# Altium PCB dsPIC Click v1.1.PcbDoc
Units mil, origin at the board's own origin, x right, y up, seen from the top; angles counter-clockwise.
Board outline 1500 x 2500 mil, 2 copper layers (Top Layer, Bottom Layer); 74 components, 48 nets, 196 pads, 18 vias.
Unrouted connection lines stored in the file: 52.
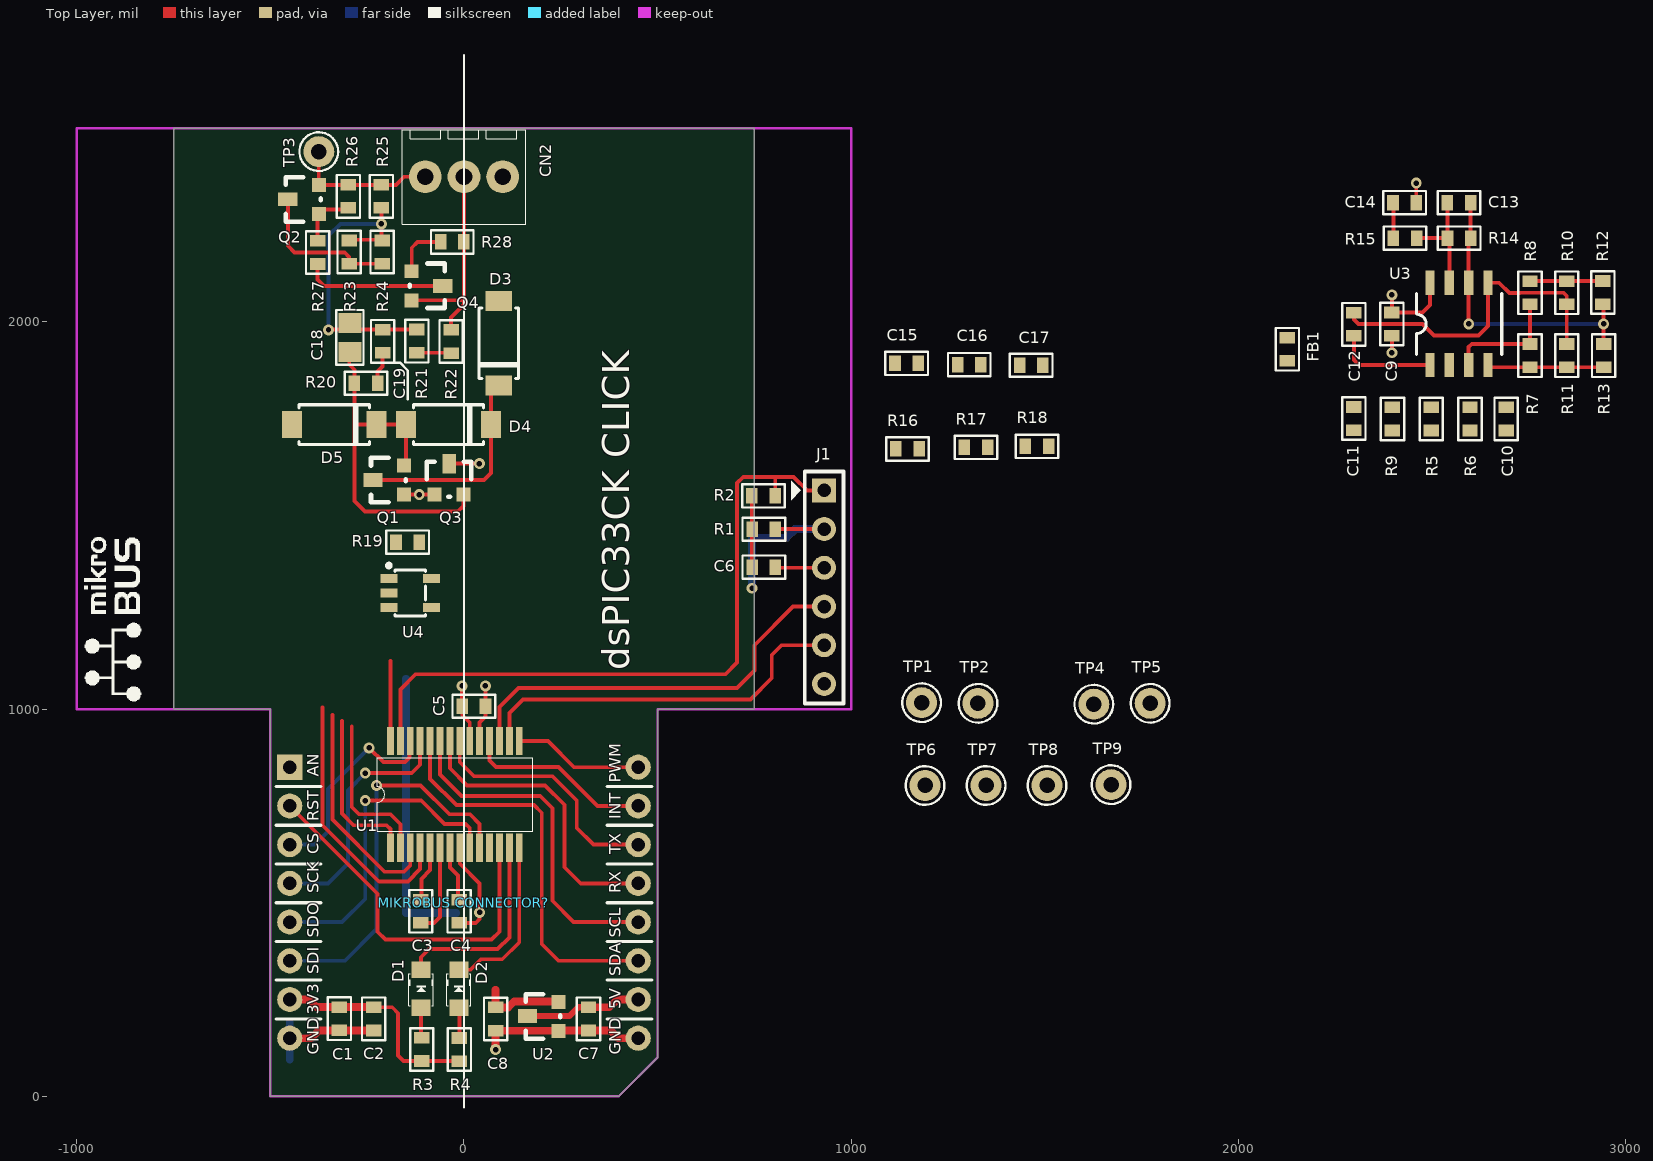
[diagram p0: Top Layer view]
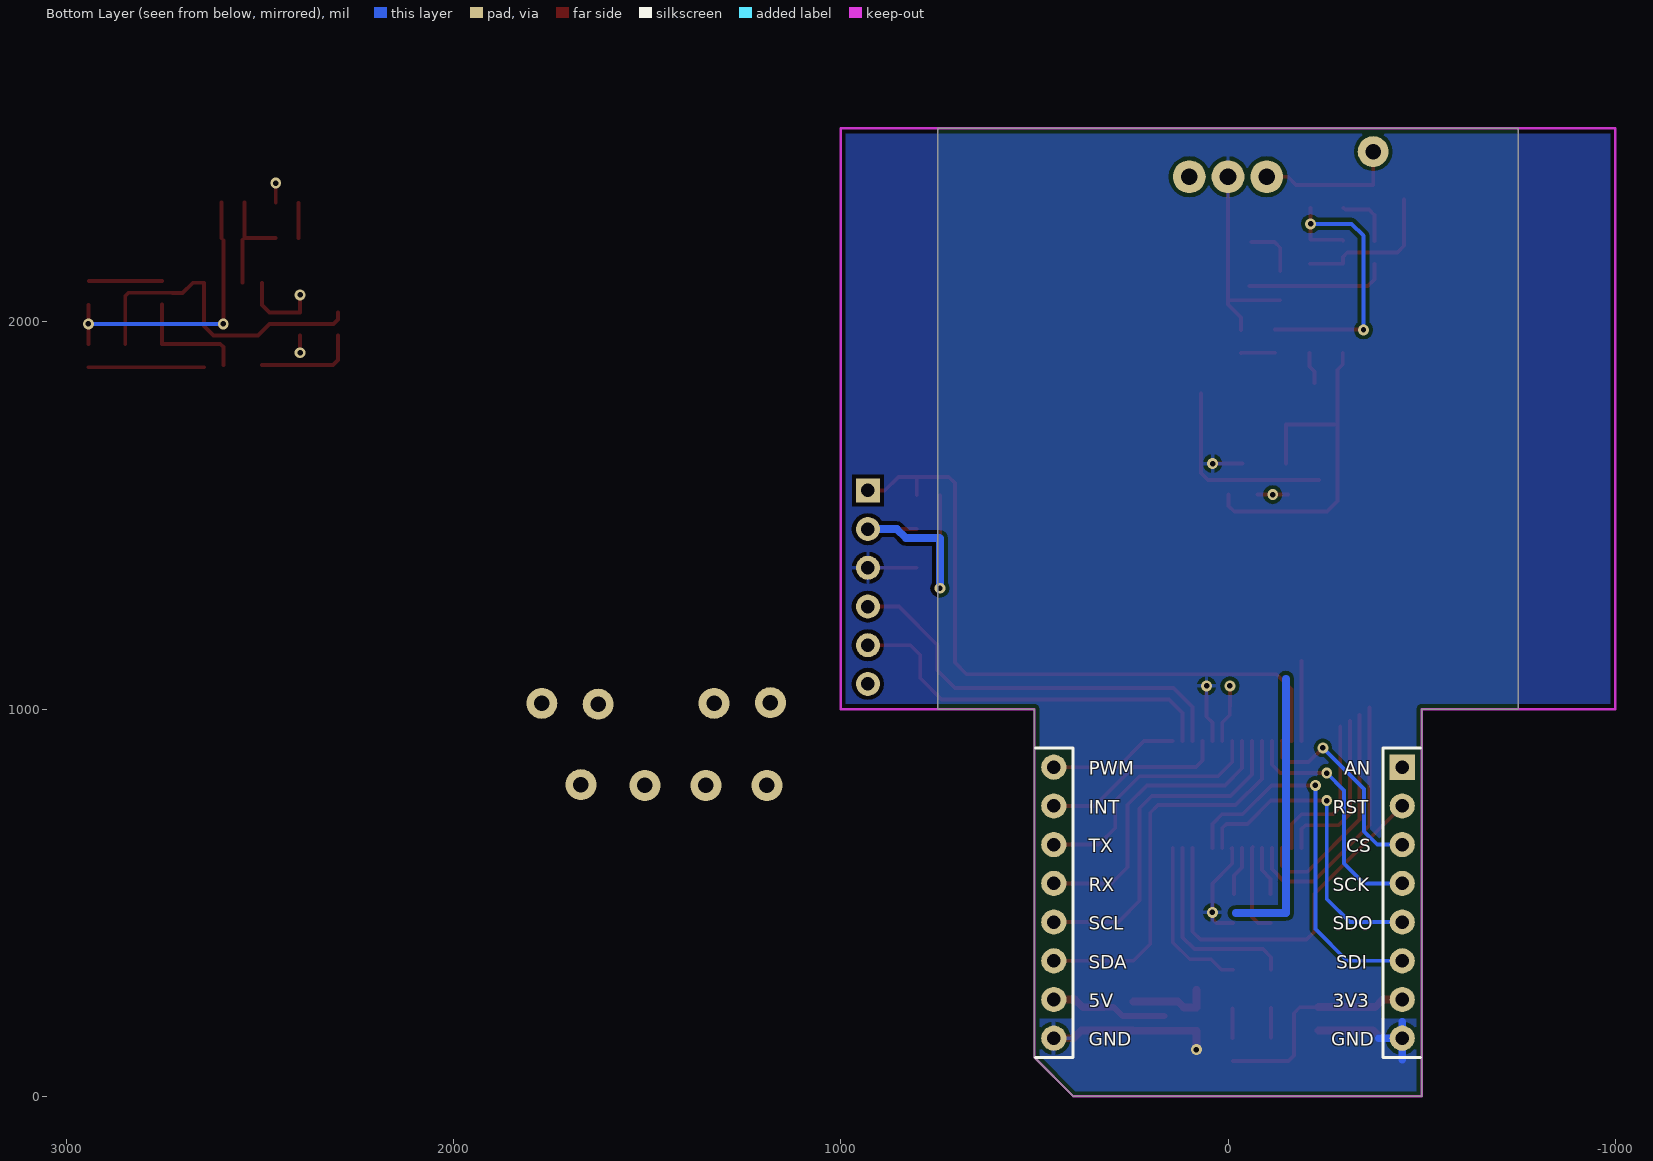
[diagram p1: Bottom Layer view, seen from below]

## Layer stack, top to bottom
Top Solder: solder mask 0.4, Solder Resist, Dk 3.5
Top Layer: signal copper 1.4
Dielectric 1: dielectric 12.6, FR-4, Dk 4.8
Bottom Layer: signal copper 1.4
Bottom Solder: solder mask 0.4, Solder Resist, Dk 3.5

## Board outline
-750,1000 -750,2500 750,2500 750,1000 500,1000 500,100 400,0 -500,0 -500,1000

## Design rules (kind name [scope] priority, off if disabled: settings)
Clearance [All] p1: gap=10
PolygonConnect [All] p1: connectstyle=Relief reliefconductorwidth=10 reliefentries=4 polygonreliefangle="90 Angle" airgapwidth=10
RoutingVias [All] p1: holewidth=28 width=50 viastyle="Through Hole" minholewidth=28 minwidth=50 maxholewidth=28 maxwidth=50
SolderMaskExpansion [All] p1: expansion=4
Width [All] p1: maxlimit=100 minlimit=8 preferedwidth=10 minimp=50.000000 maximp=50.000000 favimp=50.000000
30 further rules are at their usual default settings.

## Components (designator, comment, footprint, x,y, rotation, side; value= is the part's Value field where it differs from the comment)
C1 "1uF" 0603 -320,170 r90 top locked
C2 "0.1uF" 0603 -235,230.42 r270 top locked
C3 "0.1uF" 0603 -110,447.6 r90 top locked
C4 "0.1uF" 0603 -10.83,447.6 r90 top locked
C5 "0.1uF" 0603 -5,1005.91 r0 top
C6 "0.1uF" 0603 744.02,1365 r0 top locked
C7 "0.1uF" 0603 320,230.42 r270 top
C8 "1uF" 0603 80,230 r270 top
C9 "0.1uF" 0603 2395,2025 r270 top
C10 "0.1uF" 0603 2690,1780 r270 top
C11 "47pF" 0603 2300,1720 r90 top
C12 "0.1uF" 0603 2300,1963.5 r90 top
C13 "1000pF" 0603 2600.42,2310 r180 top
C14 "680pF" 0603 2460,2310 r180 top
C15 "1uF" 0603 1112.93,1891.31 r0 top
C16 "0.015uF" 0603 1335.42,1891.31 r180 top
C17 "1500pF" 0603 1495.42,1889.72 r180 top
C18 "22uF" 0805 -294.8,1960 r90 top
C19 "0.1uF" 0603 -211.6,1980.42 r270 top
CN2 "1725669" 1725669 -100,2375 r0 top locked
D1 "LED Red" LTST-C171 -110.8,277.76 r90 top
D2 "LED Green" LTST-C171 -13.4,277.76 r90 top
D3 "SS14" SMA-FL 90,1945 r270 top
D4 "SS14" SMA-FL -40,1735 r0 top
D5 "SS14" SMA-FL -335.09,1735 r0 top
FB1 "FB" 0603 2125,1960 r270 top
J1 "ICSP" HDR1X6 930,1565 r270 top locked
"MIKROBUS CONNECTOR?" "MIKROBUS DEVICE CONN." MIKRO_BUS_DSPIC_T 0,0 r0 top locked
Q1 "MMBT3904" SOT-23 -155,1555 r90 top
Q2 "PMV48XP" SOT-23 -375,2280 r90 top
Q3 "MMBT3906" SOT-23 -75,1554 r0 top
Q4 "2N7002" SOT-23 -135,2130 r270 top
R1 "10k" 0603 744.02,1463 r0 top locked
R2 "470R" 0603 804.02,1552.4 r180 top locked
R3 "330R" 0603 -110.8,151.5 r270 top
R4 "330R" 0603 -13.4,151.07 r270 top
R5 "10K" 0603 2500,1719.15 r90 top
R6 "10K" 0603 2600,1719.15 r90 top
R7 "10K" 0603 2755,1882.6 r90 top
R8 "200K" 0603 2755,2045 r90 top
R9 "100K" 0603 2396.6,1780 r270 top
R10 "100K" 0603 2850,2045 r90 top
R11 "100K" 0603 2850,1882.6 r90 top
R12 "1K" 0603 2943.4,2045.42 r90 top
R13 "1K" 0603 2945,1882.6 r90 top
R14 "4.99K" 0603 2540,2215 r0 top
R15 "10K" 0603 2400,2215 r0 top
R16 "1K" 0603 1115,1670.32 r0 top
R17 "10K" 0603 1291.99,1674.46 r0 top
R18 "10K" 0603 1449.47,1677.24 r0 top
R19 "0R" 0603 -176,1430 r0 top
R20 "100K" 0603 -283.46,1840 r0 top
R21 "100K" 0603 -120,1920 r90 top
R22 "10K" 0603 -35,1980 r270 top
R23 "20R" 0603 -295,2150 r90 top
R24 "20R" 0603 -210,2150 r90 top
R25 "1K" 0603 -215,2355 r270 top
R26 "100K" 0603 -300,2355 r270 top
R27 "100K" 0603 -379.57,2210 r270 top
R28 "10K" 0603 -60.63,2205 r0 top
TP1 "Test Point" TP_KEYSTONE_5003 1181.88,1016.73 r90 top
TP2 "Test Point" TP_KEYSTONE_5003 1327.55,1015 r90 top
TP3 "Test Point" TP_KEYSTONE_5003 -375,2440 r90 top
TP4 "Test Point" TP_KEYSTONE_5003 1626.76,1012.8 r90 top
TP5 "Test Point" TP_KEYSTONE_5003 1772.43,1015 r90 top
TP6 "Test Point Red" TP_KEYSTONE_5003 1190.78,802.8 r90 top
TP7 "Test Point" TP_KEYSTONE_5003 1348.46,802.8 r90 top
TP8 "Test Point" TP_KEYSTONE_5003 1505.94,802.8 r90 top
TP9 "Test Point" TP_KEYSTONE_5003 1671.29,805 r90 top
U1 "dsPIC33CK256MC502" SSOP-28 -23.62,779.53 r0 top locked
U2 "MCP1754ST-3.3v" SOT-23 244.09,170 r90 top
U3 "MCP6002" SOIC-8 2570,1995 r90 top
U4 "MCP6001" TSOP-5 -138.78,1300 r270 top
? "MikroBusLogo" MB_Large -905,1040 r90 top locked

## Footprints (in the part's own frame and the unit in brackets; to place one, negate y for a bottom-side part, rotate by r counter-clockwise, add the part's x,y. Pads: shape width x height; smd on the part's side, far side on the other; paste and mask are expansions set on the pad)
0603 [mil]
  rect 30x40 smd: 1(0.42,1.6) 2(60.42,1.6)
  silkscreen extent -25,-28 85,32
0805 [mm]
  rect 1.3x1.5 smd: 1(-0.95,0) 2(0.95,0)
  silkscreen extent -1.8,-0.9 1.8,0.9
1725669 [mil] "Connector; Terminal; 3 Position, 2.45mm"
  round 85 hole 43.31: 1(0,0) 2(100,0) 3(200,0)
  silkscreen extent -59,-122 259,122
HDR1X6 [mil]
  rect 62x62 hole 35: 1(0,0)
  round 62 hole 35: 2(100,0) 3(200,0) 4(300,0) 5(400,0) 6(500,0)
  silkscreen extent -49,-85 550,50
LTST-C171 [mm] "led, 0805"
  rect 1.1x1.25 smd: 1(-1.25,0) 2(1.25,0)
  silkscreen extent -1.1,-0.8 1,0.8
MB_Large [mil]
  silkscreen extent -20,-71 404,76
MIKRO_BUS_DSPIC_T [mil]
  rect 65x65 hole 35: 1(-450,850)
  round 65 hole 35: 2(-450,750) 3(-450,650) 4(-450,550) 5(-450,450) 6(-450,350) 7(-450,250) 8(-450,150) 9(450,150) 10(450,250) 11(450,350) 12(450,450) 13(450,550) 14(450,650) 15(450,750) 16(450,850)
  silkscreen extent -485,200 485,800, body extent -508,100 507,900, height 82
SMA-FL [mm]
  rect 1.3x1.76 smd: 1(-2.78,0) 2(2.78,0)
  silkscreen extent -2.3,-1.3 2.3,1.3
SOIC-8 [mm]
  rect 1.6x0.6 smd: 1(-2.7,1.905) 2(-2.7,0.635) 3(-2.7,-0.635) 4(-2.7,-1.905) 5(2.7,-1.905) 6(2.7,-0.635) 7(2.7,0.635) 8(2.7,1.905)
  silkscreen extent -2,-2.81 2,2.8
SOT-23 [mil]
  rect 36x36 smd: 1(-1,0) 2(74,0)
  rect 36x50 smd: 3(37,80)
  silkscreen extent -21,-5 94,85
SSOP-28 [mm]
  rect 0.45x1.85 smd mask+0.08: 1(-4.225,-3.5) 2(-3.575,-3.5) 3(-2.925,-3.5) 4(-2.275,-3.5) 5(-1.625,-3.5) 6(-0.975,-3.5) 7(-0.325,-3.5) 8(0.325,-3.5) 9(0.975,-3.5) 10(1.625,-3.5) 11(2.275,-3.5) 12(2.925,-3.5) 13(3.575,-3.5) 14(4.225,-3.5) 15(4.225,3.5) 16(3.575,3.5) 17(2.925,3.5) 18(2.275,3.5) 19(1.625,3.5) 20(0.975,3.5) 21(0.325,3.5) 22(-0.325,3.5) 23(-0.975,3.5) 24(-1.625,3.5) 25(-2.275,3.5) 26(-2.925,3.5) 27(-3.575,3.5) 28(-4.225,3.5)
  silkscreen extent -5.1,-2.4 5.1,2.4
TP_KEYSTONE_5003 [mil]
  round 80 hole 40: 1(0,0)
  silkscreen extent -50,-50 50,50
TSOP-5 [mm] "Small Outline; 6 Leads (1 Absent); Body Width 4.4 mm; Pitch 1.27 mm"
  rect 0.6x1.1 smd: 1(-0.95,-1.4) 2(0,-1.4) 3(0.95,-1.4) 4(0.95,1.4) 5(-0.95,1.4)
  silkscreen extent -1.92,-1.52 1.5,1

## Part data
C1 C2 C3 C4 C5 C6: "Capacitor"
C7 C8 C9 C10 C11 C12 C13 C14 C15 C16 C17 C18 C19: library part CAP, "Capacitor"
CN2: "Terminal Block, 3-Position"
D1: "Red LED"
D2: "Green LED"
D3 D4 D5: "Diode, Schottky"
FB1: "Ferrite Bead"
J1: library part "Header 6", "Header, 6-Pin"
"MIKROBUS CONNECTOR?": "mikroBUS Target Header"
Q1: "Transistor, NPN"
Q2: "MOSFET, P-Channel"
Q3: "Transistor, PNP"
Q4: "MOSFET"
R1 R2 R3 R4 R5 R6 R7 R8 R9 R10 R11 R12 R13 R14 R15 R16 R17 R18 R19 R20 R21 R22 R23 R24 R25 R26 R27 R28: library part Res1, "Resistor"
TP1 TP2 TP3 TP4 TP5 TP6 TP7 TP8 TP9: "Test Point, 5003"
U1: "16-bit MCU"
U2: "LDO"
U3: "OPAMP, Dual"
U4: "OPAMP, Single"
?: "Logo"

## Via types
v1: diameter 28, hole 14, Top Layer to Bottom Layer, 18 vias

## Nets (pads, with @x,y where several pads share a name; then routed paths per layer and width w, separated by ;. In a path a pad name is that pad's centre, name@x,y a point inside that pad or via, vN(x,y) a via of type N, cw(c..) or ccw(c..) an arc to the next point about the centre after c; other vN are vias at no path point)
+3.3: "MIKROBUS CONNECTOR?.7" C1.2 C2.1 C4.2 C5.1 J1.2 R1.2 R3.2 R4.2 U1.7 U1.20 | length 2032.8
  Top Layer w10: C2.1 -185.42,230 -170,214.58 -170,105 -156.07,91.07 R3.2 R4.2@-12.23,91.07 ; U1.7 -36.42,591.42 -15,570 C4.2@-15,522.4 ; v1(-5,1060) -5,1007.93 C5.1 -4.58,984.58 14.76,965.24 U1.20 ; R1.2@804.84,1465 J1.2
  Top Layer w20: -450,250 -399.58,250 -380,230.42 C1.2 -233.83,230.42 C2.1
  Bottom Layer w20: -149.61,1078.74 -149.61,555.12 ; -149.06,555.67 -149.61,555.12 ; -19.69,473.43 -149.61,473.43 -149.61,555.12 ; v1(744.02,1312.24) 744.02,1441.22 744.96,1442.17 832.36,1442.17 855.2,1465 J1.2
+3.3A: C3.2 C8.1 C9.1 R8.2 R10.2 R12.2 TP7.1 U1.5 U2.2 U3.8 | length 740.9
  Top Layer w10: C3.2@-110,522.4 -110,561.72 -87.6,584.12 U1.5 ; v1(2396.6,2070) C9.1 2475.32,2024.58 2495,2044.25 U3.8 ; R8.2@2753.83,2105.85 R12.2
  Top Layer w20: 81.6,275 C8.1 114.15,229.58 129.58,245 244.09,245 U2.2
+5: "MIKROBUS CONNECTOR?.10" C7.1 C15.1 D3.1 TP6.1 U2.3 U4.5 | length 303.7
  Top Layer w16: U2.3 272.42,207 295.42,230 C7.1
  Top Layer w20: C7.1 375.42,230 395.42,250 450,250
AGND: C3.1 C9.2 C10.2 C14.1 FB1.2 R7.1 R11.1 R13.1 U1.6 U3.4 | length 628.4
  Top Layer w10: C3.1@-110,447.6 -77.4,447.6 -62.01,462.99 U1.6 U1.6@-63.74,643.46 ; v1(2396.6,1920.42) C9.2 ; C14.1 v1(2459.58,2358.73) ; U3.4@2645,1883.02 R7.1 R11.1 R13.1
BAT_DETECT: R21.1 R22.2 U1.4 | length 773.5
  Top Layer w10: -365,1005 -365,700 -220,555 -145,555 -113.19,586.81 U1.4 ; R21.1 -34.25,1920.42 R22.2
BAT_SNS_ADC: C14.2 R15.1 TP1.1 U1.1 | length 520.8
  Top Layer w10: -315,970 -315,730 -285,700 -200,700 -189.96,689.96 U1.1 ; R15.1 C14.2@2400.42,2307.55
BAT_TH: CN2.3 U1.2 | length 413
  Top Layer w10: -290,955 -290,746.96 -271.39,728.35 -189.96,728.35 -164.37,702.76 U1.2
DAC_SINE: R16.1 TP4.1 U1.3 | length 579.4
  Top Layer w10: -340,985 -340,715 -205,580 -155,580 -138.78,596.22 U1.3
IRQ: "MIKROBUS CONNECTOR?.15" U1.18 | length 482.8
  Top Layer w10: U1.18 65.94,867.13 82.68,850.39 244.09,850.39 344.49,750 450,750
LED_GRN: D2.2 U1.14 | length 429.4
  Top Layer w10: D2.2 16.97,326.97 43.98,353.98 98.98,353.98 142.72,397.72 U1.14
LED_RED: D1.2 U1.13 | length 512.7
  Top Layer w10: D1.2 -110.8,359.2 -90,380 86.69,380 117.13,410.43 U1.13
MCLR: J1.1 R2.1 U1.27 | length 1789.1
  Top Layer w10: U1.27 -164.37,1050.63 -125,1090 675.59,1090 705.59,1120 705.59,1583.9 721.34,1599.65 804.02,1599.65 ; R2.1@804.02,1552.4 804.02,1599.65 ; J1.1 929.21,1564.21 886.69,1564.21 851.26,1599.65 804.02,1599.65
NetC6_1: C6.1 R1.1 R2.2 | length 187.4
  Top Layer w10: C6.1@744.02,1365 744.02,1456.93 R2.2@744.02,1552.4
NetC10_1: C10.1 R6.2 R7.2 R8.1 U3.3 | length 310.4
  Top Layer w10: U3.3 2595,1935 2603.02,1943.02 R7.2 R8.1
NetC11_1: C11.1 R5.2 R9.2 U3.2
NetC11_2: C11.2 C12.1 R9.1 U3.1 | length 265.3
  Top Layer w10: C12.1@2298.4,1965 2298.4,1901.6 2311.3,1888.7 U3.1
NetC12_2: C12.2 R10.1 R11.2 U3.5 | length 845
  Top Layer w10: C12.2@2298.4,2024.42 C12.2 2298.4,2006.6 2310.42,1994.58 2475.42,1994.58 2505,1965 2620,1965 2645,1990 U3.5 2673.7,2101.3 2700,2075 2726.76,2075 2727.19,2075.42 2839.58,2075.42 2848.4,2066.6 R10.1 R11.2
NetC13_1: C13.1 R12.1 R13.2 R14.2 U3.6 | length 757.2
  Top Layer w10: v1(2595,1995) U3.6 R14.2@2595,2211.17 ; R14.2@2600,2217.02 C13.1 ; R13.2 v1(2943.4,1995) R12.1@2943.4,2044.25
  Bottom Layer w10: v1(2595,1995) v1(2943.4,1995)
NetC13_2: C13.2 R14.1 R15.2 U3.7 | length 281.9
  Top Layer w10: R15.2 2460.85,2217.02 2540,2217.02 C13.2 ; U3.7 R14.1@2545,2212.02
NetC16_1: C16.1 R16.2 R17.1
NetC18_1: C18.1 D4.1 D5.2 Q1.2 Q3.2 R20.1 TP2.1 | length 951
  Top Layer w10: C18.1@-296.4,1920.42 -296.4,1890 -283.04,1876.64 R20.1 -283.04,1537.72 -255.31,1510 -16,1510 -1,1525 Q3.2 ; -283.04,1735 D5.2 D4.1 Q1.2@-149.45,1634.55
NetC18_2: C18.2 C19.1 R21.2 R23.2 R24.2 R25.2 | length 787.2
  Top Layer w10: v1@-350,1980.42 -296.4,1980.42 R21.2 ; R23.2 -294.8,2212.23 -213.4,2212.23 v1(-213.4,2253.4) R25.2
  Bottom Layer w10: v1(-350,1979.58) -350,2222.83 -319.43,2253.4 v1(-213.4,2253.4)
NetC19_2: C19.2 R18.2 R20.2 | length 83.8
  Top Layer w10: R20.2 -223.04,1871.96 -210,1885 C19.2
NetD1_1: D1.1 R3.1 | length 77.5
  Top Layer w10: R3.1@-110.8,151.07 D1.1
NetD2_1: D2.1 R4.1 | length 76.3
  Top Layer w10: R4.1 D2.1@-11.8,226.94
NetD3_2: D3.2 D4.2 Q1.3 | length 517.2
  Top Layer w10: Q1.3 52,1592 69.45,1609.45 D4.2 D3.2@69.45,1815
NetQ1_1: Q1.1 Q3.1 R19.2 | length 79
  Top Layer w10: Q1.1 Q3.1
  other v1: -115.5,1554
NetQ2_1: Q2.1 R26.2 R27.1 | length 153.7
  Top Layer w10: R27.1 -377.97,2276.03 Q2.1 -364,2290 -302.98,2290 R26.2
NetQ2_3: Q2.3 R23.1 R24.1 | length 393.1
  Top Layer w10: Q2.3 -455,2196.93 -437.65,2179.58 -307.98,2179.58 -296.6,2168.2 R23.1 R24.1
NetQ4_3: Q4.3 R27.2 | length 369.6
  Top Layer w10: R27.2 -377.97,2110 -360.97,2093 Q4.3
NetR18_1: R18.1 U4.4
NetR19_1: R19.1 U4.1
PGC: J1.5 U1.16 | length 992.9
  Top Layer w10: U1.16 117.13,989.57 152.56,1025 740,1025 795,1080 795,1140 820,1165 J1.5
PGD: J1.4 U1.17 | length 1072.4
  Top Layer w10: U1.17 91.54,1005.91 140.63,1055 705,1055 750,1100 750,1165 850,1265 J1.4
PWM: "MIKROBUS CONNECTOR?.16" U1.15 | length 335.2
  Top Layer w10: U1.15 216.54,917.32 283.86,850 450,850
RST: "MIKROBUS CONNECTOR?.2" U1.12 | length 966.9
  Top Layer w10: -450,750 -223.04,523.04 -223.04,425 -203.04,405 71.54,405 91.54,425 U1.12
RXD: "MIKROBUS CONNECTOR?.13" U1.22 | length 773.9
  Top Layer w10: U1.22 -36.42,847.44 7.87,803.15 209.61,803.15 259.84,752.91 259.84,591.73 301.57,550 450,550
SCL: "MIKROBUS CONNECTOR?.12" U1.23 | length 896.4
  Top Layer w10: U1.23 -62.01,830.71 -6.89,775.59 196.85,775.59 228.35,744.09 228.35,504.92 283.27,450 450,450
SDA: "MIKROBUS CONNECTOR?.11" U1.24 | length 1028.2
  Top Layer w10: U1.24 -87.6,819.88 -19.69,751.97 181.1,751.97 200.79,732.28 200.79,393.31 244.09,350 450,350
SINE_ADC: C17.1 R17.2 TP5.1 U1.28 U4.3 | length 207.7
  Top Layer w10: U1.28 -189.96,1125
SNS+: CN2.1 Q2.2 R6.1 R25.1 R26.1 TP3.1 | length 369.7
  Top Layer w10: TP3.1 Q2.2 -176,2354 -155,2375 CN2.1
SNS-: "MIKROBUS CONNECTOR?.8" "MIKROBUS CONNECTOR?.9" C1.1 C2.2 C4.1 C5.2 C6.2 C7.2 C8.2 C15.2 C16.2 C17.2 CN2.2 D5.1 FB1.1 J1.3 Q3.3 Q4.2 R5.1 R22.1 R28.2 TP8.1 TP9.1 U1.8 U1.19 U2.1 U4.2 | length 1975.8
  Top Layer w10: Q4.2 0,2056 ; Q3.3 v1(39.8,1634) ; R22.1 -33.4,2011.6 -0.2,2044.8 R28.2 ; C4.1 30.42,448.02 40.35,457.95 40.35,549.65 -10.83,600.83 U1.8 U1.8@-9.09,640 ; R28.2@0,2206.8 CN2.2 ; U1.19 40.35,965.35 55.42,980.42 C5.2 v1(55.42,1060) ; C6.2@804.02,1365 J1.3
  Top Layer w20: -450,150 -395,150 -375,170 C2.2 ; v1(81.6,120.58) C8.2 C8.2@82.17,169 ; C8.2@86.69,164.48 C8.2@82.17,169 ; 450,150 399,150 379,170 C7.2 245.09,170 U2.1 C8.2@82.17,169
  Bottom Layer w20: -450,95 -450,150 ; -450,192.21 -450,150 ; -390,150 -450,150
  other v1: 40.35,475
SPI_CS: "MIKROBUS CONNECTOR?.3" U1.26 | length 540.6
  Top Layer w10: v1(-245,900) -208.19,863.19 -152.02,863.19 -140.51,874.69 -140.51,915.59 U1.26
  Bottom Layer w10: -450,650 -385.43,650 -351.57,683.86 -351.57,793.43 v1(-245,900)
SPI_SCK: "MIKROBUS CONNECTOR?.4" U1.25 | length 634.9
  Top Layer w10: v1(-255,834.65) -134.84,834.65 -113.19,856.3 U1.25
  Bottom Layer w10: -450,550 -351.57,550 -300,601.57 -300,789.65 v1(-255,834.65)
SPI_SDI: "MIKROBUS CONNECTOR?.6" U1.10 | length 998.7
  Top Layer w10: v1(-225.64,803.15) -112.24,803.15 -37.44,728.35 15.75,728.35 40.35,703.74 U1.10
  Bottom Layer w10: -450,350 -307.48,350 -225.64,431.84 v1(-225.64,803.15)
SPI_SDO: "MIKROBUS CONNECTOR?.5" U1.9 | length 824.1
  Top Layer w10: v1(-255,763.78) -110.24,763.78 -50.2,703.74 3.94,703.74 14.76,692.91 U1.9
  Bottom Layer w10: -450,450 -314.76,450 -255,509.76 v1(-255,763.78)
TEST_EN: Q4.1 R28.1 U1.11 | length 141.7
  Top Layer w10: Q4.1 -135,2191.8 -120.2,2206.6 R28.1
TXD: "MIKROBUS CONNECTOR?.14" U1.21 | length 644.8
  Top Layer w10: U1.21 -10.83,863.19 25.59,826.77 228.35,826.77 291.34,763.78 291.34,692.91 334.25,650 450,650
pads on no net: "MIKROBUS CONNECTOR?.1" J1.6

## Polygon pours and split planes (outlines as drawn)
SNS- on Bottom Layer "SNS-_L02_P000" (solid, remove dead copper, pour order 0): -1000,2500 1000,2500 1000,1000 500,1000 500,900 400,900 400,200 490,200 490,105 395,10 375,10 -490,10 -490,200 -395,200 -395,900 -500,900 -500,1000 -1000,1000

## Keep-outs
Keep-Out Layer:
  lines w6: -1000,1000 -1000,2500 1000,2500 1000,1000 500,1000 500,100 400,0 -500,0 -500,1000 -1000,1000

## Silkscreen, mask and mechanical layers (free items; w line width, h text height)
Top Overlay:
  lines w4: 0,-30 0,2690
  lines w6: -180,1895 -165.55,1895 -145,1874.45 -145,1800

## Text inside footprints (layer, text, board x,y; h text height)
"MIKROBUS CONNECTOR?": Top Overlay "PWM" at 405,810 h30 r90; Top Overlay "CS" at -375,625 h30 r90; Top Overlay "TX" at 405,625 h30 r90; Top Overlay "RX" at 405,525 h30 r90; Top Overlay "SCL" at 405,410 h30 r90; Top Overlay "SDA" at 405,310 h30 r90; Top Overlay "GND" at 405,107 h30 r90; Top Overlay "SDO" at -375,410 h30 r90; Top Overlay "RST" at -375,710 h30 r90; Top Overlay "INT" at 405,715 h30 r90; Top Overlay "SCK" at -375,525 h30 r90; Top Overlay "AN" at -375,825 h30 r90; Top Overlay "SDI" at -375,315 h30 r90; Top Overlay "5V" at 405,225 h30 r90; Top Overlay "3V3" at -375,210 h30 r90; Top Overlay "GND" at -375,107 h30 r90; Top Overlay "dsPIC33CK CLICK" at 450,1100 h120 r90; Bottom Overlay "SCK" at -270,530 h35; Bottom Overlay "AN" at -300,830 h35; Bottom Overlay "TX" at 360,630 h35; Bottom Overlay "RX" at 360,530 h35; Bottom Overlay "5V" at 360,230 h35; Bottom Overlay "GND" at 360,130 h35; Bottom Overlay "PWM" at 360,830 h35; Bottom Overlay "RST" at -270,730 h35; Bottom Overlay "SDA" at 360,330 h35; Bottom Overlay "SDO" at -270,430 h35; Bottom Overlay "3V3" at -270,230 h35; Bottom Overlay "GND" at -267,130 h35; Bottom Overlay "CS" at -305,630 h35; Bottom Overlay "SDI" at -280,330 h35; Bottom Overlay "INT" at 360,730 h35; Bottom Overlay "SCL" at 360,430 h35